# EAGLE board c12666afe (EAGLE 7.6.0)
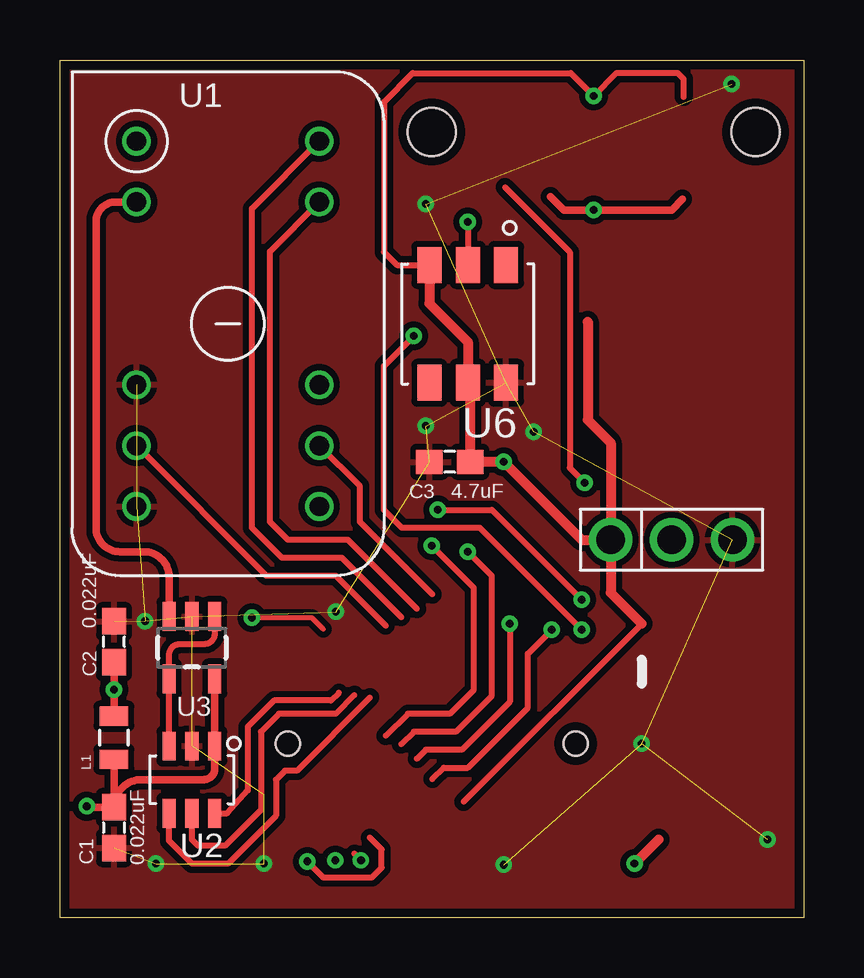
[diagram p0: board, top side]
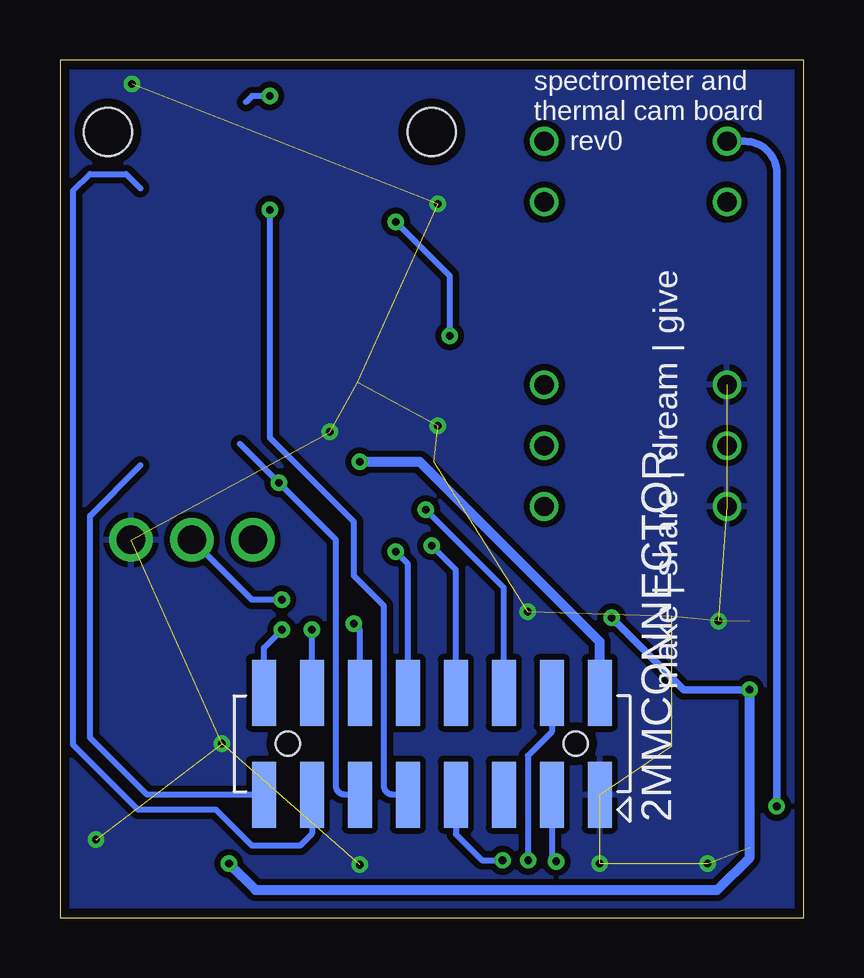
[diagram p1: board, bottom side, seen from below]

Size 31 x 35.75 mm. Coordinates in mm from the lower left corner, seen from the top.
Outline: 0,0 0,35.75 31,35.75 31,0 0,0
Copper layers (1*16): Top 0.0356mm / dielectric 1.5011mm / Bottom 0.0356mm
Design rules "default *": minimum track width 6mil, minimum drill 13mil, track to track 10mil, track to pad 7mil, pad to pad 7mil, via to via 7mil, smd to smd 7mil, copper to edge 15mil, drill to drill 6mil, minimum pad ring 7mil, minimum via ring 7mil, stop-mask expansion 3mil, vias tented up to drill 0mil, thermal gap 10mil
Net classes: 1 supply: width 0.178 mm; 3 usbvcc: width 0.61 mm, drill 0.508 mm, clearance 0.203 mm to class 0, clearance 0.254 mm; 5 USB: width 0.14 mm
Holes 2 mm at 29,32.75 15.5,32.75

## Footprints (pad centres in the part's own frame; a part is rotated, then mirrored left to right if it is on the bottom)
MOLEX-0877591650 = smd 1 x 2.75: 1 7,-2.125; 2 7,2.125; 3 5,-2.125; 4 5,2.125; 5 3,-2.125; 6 3,2.125; 7 1,-2.125; 8 1,2.125; 9 -1,-2.125; 10 -1,2.125; 11 -3,-2.125; 12 -3,2.125; 13 -5,-2.125; 14 -5,2.125; 15 -7,-2.125; 16 -7,2.125 | hole 1: -6,0; 6,0
0603 = smd 1.1 x 1: 1 -0.85,0; 2 0.85,0
1X03 = drill 1.2: 1 -2.54,0; 2 0,0; 3 2.54,0
0805 = smd 0.8 x 1.2: 1 -0.9,0; 2 0.9,0
C12666MA = drill 0.8: 1 -7.62,-3.81; 2 -5.08,-3.81; 3 2.54,-3.81; 4 5.08,-3.81; 5 7.62,-3.81; 6 7.62,3.81; 7 5.08,3.81; 8 2.54,3.81; 9 -5.08,3.81; 10 -7.62,3.81
SOT-23-6L = smd 0.55 x 1.2: 1 -0.95,-1.4; 2 0,-1.4; 3 0.95,-1.4; 4 0.95,1.4; 5 0,1.4; 6 -0.95,1.4
SOT23-5 = smd 0.55 x 1.2: 1 -0.95,-1.3; 2 0,-1.3; 3 0.95,-1.3; 4 0.95,1.3; 5 -0.95,1.3
WS2812 = smd 1.5 x 1: 1 2.45,-1.6; 2 2.45,0; 3 2.45,1.6; 4 -2.45,1.6; 5 -2.45,0; 6 -2.45,-1.6

## Placement (x,y rotation side)
2MMCONNECTOR  CON-MOLEX-2MMMALE  [MOLEX-0877591650]  15.5,7.25 0 bottom
C1  0.022uF  [0603]  2.25,3.75 270 top
C2  0.022uF  [0603]  2.25,11.5 90 top
C3  4.7uF  [0603]  16.25,19 180 top
CN2  1X03  [1X03]  25.5,15.75 0 top
L1  100uH  [0805]  2.25,7.5 270 top
U1  MICROSPEC-C12666MA  [C12666MA]  7,24.75 270 top
U2  AD7940  [SOT-23-6L]  5.5,5.75 180 top
U3  OPA344  [SOT23-5]  5.5,11.25 180 top
U6  WS2812_NEOPIXEL  [WS2812]  17,24.75 90 top

## Library data of the parts
2MMCONNECTOR = notes-arducorder-mini
C1 C2 U2 = notes_mark5
C3 U6 = notes_mark5a
CN2 U1 = arducorder-mini
L1 = SparkFun-Passives
U3 = SparkFun-AnalogIC

## Nets
3.3V: 2MMCONNECTOR.2 C3.1 CN2.1 U6.3 U6.5
5V: C2.1 L1.1
AN3: 2MMCONNECTOR.4
AN4: 2MMCONNECTOR.6 CN2.2
AN5: 2MMCONNECTOR.8
CLK_5V: U1.4
EOS_5V: U1.10
GAIN_5V: U1.9
GND: 2MMCONNECTOR.1 C1.2 C2.2 C3.2 CN2.3 U1.3 U1.5 U2.2 U3.2 U6.6
IO45/LED_DIN: 2MMCONNECTOR.16 U6.2
IO46: 2MMCONNECTOR.14
IO80: 2MMCONNECTOR.12
IO81: 2MMCONNECTOR.10
N$1: U2.3 U3.1 U3.4
N$2: U1.2 U3.3
SCL: 2MMCONNECTOR.11
SDA: 2MMCONNECTOR.9
SPI_CLK: 2MMCONNECTOR.3
SPI_CLK_5V: U2.4
SPI_CS_5V: U2.6
SPI_MISO: 2MMCONNECTOR.7
SPI_MISO_5V: U2.5
SPI_MOSI: 2MMCONNECTOR.5
ST_5V: U1.7
U3BRX: 2MMCONNECTOR.15
U3BTX: 2MMCONNECTOR.13
V_SPEC: C1.1 L1.2 U1.1 U2.1 U3.5

## Tracks (layer width: path | path; a pad name or v marks a point on that pad's centre or on a via)
3.3V  (via drill 0.33)
  Top 0.254: 26,34.21 26,34.95 25.75,35.2 23.2,35.2 v22.25,34.25 | 22.23,34.27 v22.25,34.25 | U6.3 14.05,27.2 13.5,27.75 13.5,34 14.7,35.2 21.3,35.2 v22.25,34.25 | 16.82,4.82 24.25,12.25
  Top 0.406: U6.3 15.4,25.6 17,24 U6.5 17.1,22.2 C3.1 v18.5,19 21.75,15.75 CN2.1 | CN2.1 22.96,13.54 24.25,12.25 | 23,15.75 CN2.1 | 22,24.84 22,20.75 22.96,19.79 CN2.1
  Bottom 0.254: v22.25,34.25 23,34.25 23.25,34
  Bottom 0.406: 2MMCONNECTOR.2 8.5,11.5 16,19 v18.5,19
5V  (via drill 0.33)
  Top 0.203: 10.98,12.02 10.5,12.5 v8,12.5
  Top 0.305: C2.1 v2.25,9.5 L1.1
  Top 0.406: 24.95,3.25 v23.95,2.25
  Bottom 0.305: v8,12.5 5,9.5 v2.25,9.5
  Bottom 0.406: v23.95,2.25 22.85,1.15 3.6,1.15 2.25,2.5 v2.25,9.5
AN3  (via drill 0.33)
  Top 0.254: 11.62,2.53 v11.48,2.39
  Bottom 0.254: 2MMCONNECTOR.4 10.5,7.75 11.5,6.75 11.5,2.41 v11.48,2.39
AN4  (via drill 0.33)
  Top 0.254: v15.75,17 18.01,17 18.01,16.99 v21.75,13.25
  Bottom 0.254: 2MMCONNECTOR.6 12.5,13.75 v15.75,17 | v21.75,13.25 23,13.25 CN2.2
AN5  (via drill 0.33)
  Top 0.254: 13.57,7.57 14.5,8.5 16.25,8.5 17.25,9.5 17.25,13.75 v15.5,15.5
  Bottom 0.254: 2MMCONNECTOR.8 14.5,14.5 v15.5,15.5
CLK_5V
  Top 0.254: 13.57,12.18 11.5,14.25 8.61,14.25 U1.4
EOS_5V
  Top 0.254: 14.23,12.52 11.75,15 9.25,15 8,16.25 8,29.56 U1.10
GAIN_5V
  Top 0.254: 14.88,12.88 12,15.75 9.5,15.75 8.75,16.5 8.75,27.77 U1.9
GND  (via drill 0.33)  (20 unrouted)
  other vias: 3.55,12.36 15.25,29.75 4,2.25 18.5,2.2 29.5,3.25 28,34.75 11.5,12.75 19.75,20.25 15.25,20.5 8.5,2.25 24.25,7.25
  pour Top: 0,35.75 0,0 31,0 31,35.75
  pour Bottom: 0,0 0,35.75 31,35.75 31,0
IO45/LED_DIN  (via drill 0.33)
  Top 0.254: v14.75,24.25 13.5,23 13.5,17 14.25,16.25 17.5,16.25 v21.75,12 | v17,29 U6.2
  Bottom 0.254: 2MMCONNECTOR.16 22.5,11.25 v21.75,12 | v14.75,24.25 14.75,26.75 v17,29
IO46  (via drill 0.33)
  Top 0.254: 15.52,5.78 16,6.25 17,6.25 19.5,8.75 19.5,11 v20.5,12
  Bottom 0.254: 2MMCONNECTOR.14 v20.5,12
IO80  (via drill 0.33)
  Top 0.254: v18.75,12.25 18.75,9 16.75,7 15.25,7 14.88,6.62
  Bottom 0.254: 2MMCONNECTOR.12 18.5,12 v18.75,12.25
IO81  (via drill 0.33)
  Top 0.254: 14.23,7.22 14.75,7.75 16.5,7.75 18,9.25 18,14.25 v17,15.25
  Bottom 0.254: 2MMCONNECTOR.10 16.5,14.75 v17,15.25
N$1
  Top 0.254: U2.3 U3.4 4.55,10.95 arc-90 5,11.4 6.05,11.4 arc90 6.45,11.85 U3.1
N$2
  Top 0.305: U1.2 2.33,29.83 arc90 1.5,29 1.5,16.25 arc90 2.5,15.25 3.5,15.25 arc-90 4.55,14.2 U3.3
SCL  (via drill 0.33)
  Top 0.254: 18.55,30.45 21.25,27.75 21.25,18.75 v21.88,18.12
  Bottom 0.254: 2MMCONNECTOR.11 19.12,5.12 arc90 19.5,5.5 19.5,15.75 v21.88,18.12 23.5,19.75
SDA  (via drill 0.33)
  Top 0.305: 20.45,30.05 21,29.5 v22.25,29.5 25.5,29.5 25.95,29.95
  Bottom 0.254: 2MMCONNECTOR.9 17.12,5.12 arc90 17.5,5.5 17.5,13 18.75,14.25 18.75,16.5 22.25,20 v22.25,29.5
SPI_CLK  (via drill 0.33)
  Top 0.254: v10.31,2.34 10.97,1.67 13,1.67 13.41,2.08 13.41,2.84 12.93,3.33
  Bottom 0.254: 2MMCONNECTOR.3 10.5,2.52 v10.31,2.34
SPI_CLK_5V
  Top 0.254: 12.93,9.18 9.88,6.12 9.38,6.12 9,5.75 9,4.25 7,2.25 5.5,2.25 4.55,3.2 U2.4
SPI_CS_5V
  Top 0.254: 11.62,9.38 11.3,9.05 8.93,9.05 7.82,7.95 7.82,5.3 6.98,4.35 U2.6
SPI_MISO  (via drill 0.33)
  Top 0.254: v12.55,2.39 12.27,2.66
  Bottom 0.254: 2MMCONNECTOR.7 14.5,3.47 13.41,2.39 v12.55,2.39
SPI_MISO_5V
  Top 0.254: 12.27,9.28 11.5,8.5 9.12,8.5 8.38,7.75 8.38,4.5 6.88,3 5.75,3 5.5,3.25 U2.5
ST_5V
  Top 0.254: 15.52,13.48 12.5,16.5 12.5,17.98 U1.7
U3BRX
  Bottom 0.254: 2MMCONNECTOR.15 27.38,5.12 29.75,7.5 29.75,16.75 27.65,18.85
U3BTX
  Bottom 0.254: 2MMCONNECTOR.13 20.5,3.5 21,3 23,3 24.5,4.5 27.75,4.5 30.45,7.2 30.45,30.3 29.75,31 28.25,31 27.65,30.4
V_SPEC  (via drill 0.33)
  Top 0.305: C1.1 L1.2 | U3.5 U2.1 6.45,6.2 arc-90 6,5.75 3.4,5.75 arc90 C1.1 | C1.1 1.15,4.6 v1.12,4.64
  Bottom 0.305: v1.12,4.64 1.12,31.04 arc-90 2.44,32.36 3.18,32.36 arc90 U1.1

## Text on the board
bPlace: spectrometer and | thermal cam board | rev0 | make | share | dream | give